# Altium PCB PCB SENSOR RPM.PcbDoc
Units mm, origin at the board's own origin, x right, y up, seen from the top; angles counter-clockwise.
Board outline 50 x 20 mm, 2 copper layers (Top Layer, Bottom Layer), stack 0.884 mm thick; 15 components, 7 nets, 41 pads, 6 vias.
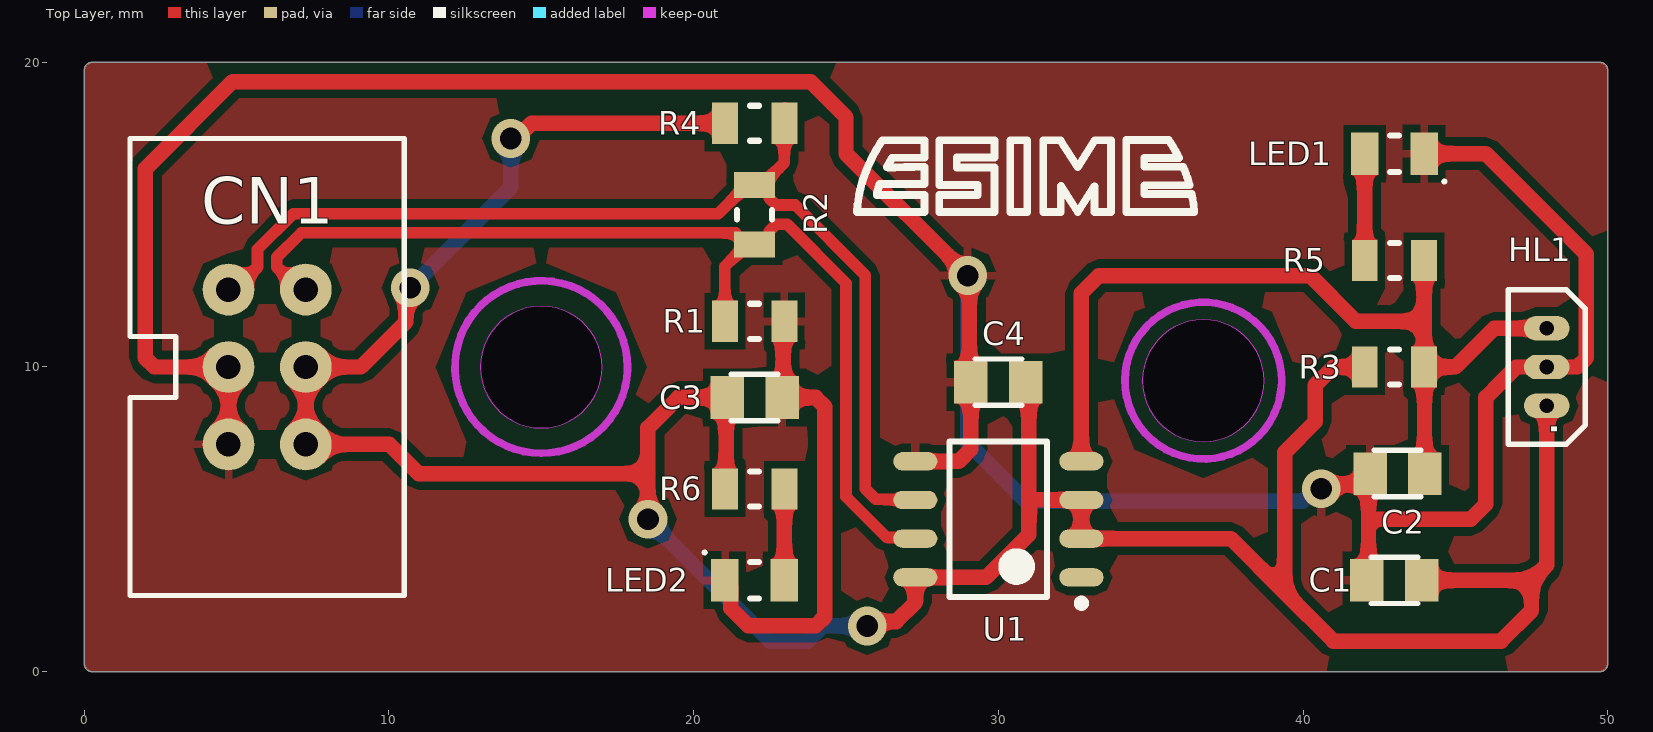
[diagram p0: Top Layer view]
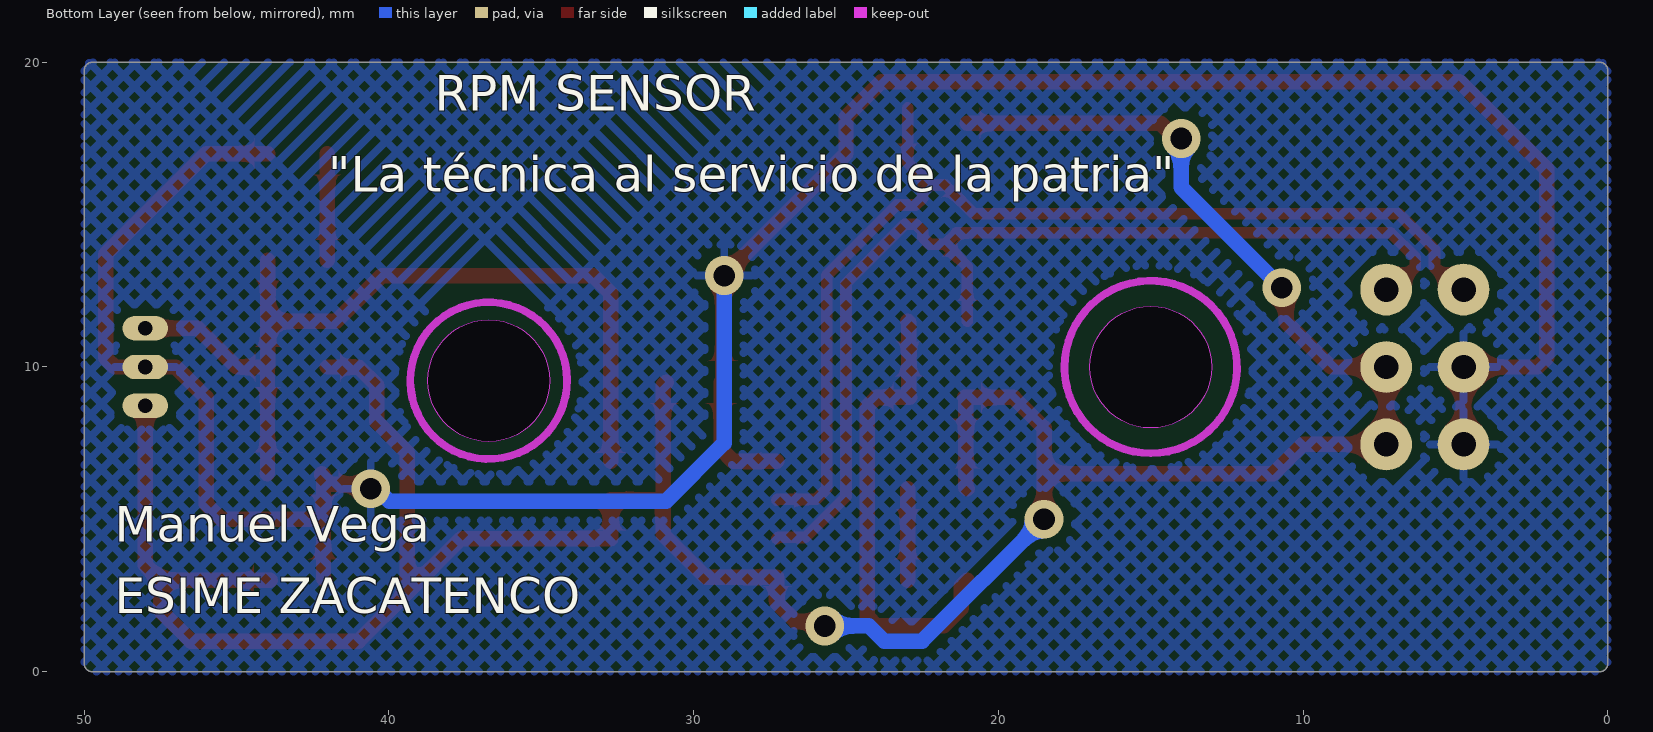
[diagram p1: Bottom Layer view, seen from below]

## Layer stack, top to bottom
Top Solder: solder mask 0.0102, Solder Resist, Dk 3.5
Top Layer: signal copper 0.0356
Dielectric 1: dielectric 0.8128, FR-4, Dk 4.8
Bottom Layer: signal copper 0.0356
Bottom Solder: solder mask 0.0102, Solder Resist, Dk 3.5

## Board outline
0,0.254 0,19.746 cw(c0.254,19.746) 0.254,20 49.746,20 cw(c49.746,19.746) 50,19.746 50,0.254 cw(c49.746,0.254) 49.746,0 0.254,0 cw(c0.254,0.254)
cut-out: 34.728,9.553 ccw(c36.728,9.553) 36.728,7.553 ccw(c36.728,9.553) 38.728,9.553 ccw(c36.728,9.553) 36.728,11.553 ccw(c36.728,9.553)
cut-out: 12.997,9.999 ccw(c14.997,9.999) 14.997,7.999 ccw(c14.997,9.999) 16.997,9.999 ccw(c14.997,9.999) 14.997,11.999 ccw(c14.997,9.999)

## Design rules (kind name [scope] priority, off if disabled: settings)
Clearance [All] p1: gap=0.254 ignorepadtopadclearanceinfootprint=FALSE
DiffPairsRouting DiffPairsRouting_1 [All] p1: maxlimit=0.254 minlimit=0.254 mostfreqgap=0.254 toplayer_minwidth=0.381 toplayer_maxwidth=0.381 toplayer_prefwidth=0.381 bottomlayer_minwidth=0.381 bottomlayer_maxwidth=0.381 bottomlayer_prefwidth=0.381 maxuncoupledlength=12.7
DiffPairsRouting [All] p2: maxlimit=0.254 minlimit=0.254 mostfreqgap=0.381 toplayer_minwidth=0.381 toplayer_maxwidth=0.762 toplayer_prefwidth=0.381 bottomlayer_minwidth=0.381 bottomlayer_maxwidth=0.762 bottomlayer_prefwidth=0.381 maxuncoupledlength=12.7
HoleSize [All] p1: absolutevalues=TRUE maxlimit=6.3 minlimit=0.2 maxpercent=80.000 minpercent=20.000
MinimumSolderMaskSliver [All] p1: minsoldermaskwidth=0.2
PolygonConnect [All] p1: connectstyle=Relief reliefconductorwidth=0.254 reliefentries=4 polygonreliefangle="90 Angle" airgapwidth=0.254
RoutingVias [All] p1: holewidth=0.711 width=1.27 viastyle="Through Hole" minholewidth=0.305 minwidth=0.4 maxholewidth=0.711 maxwidth=1.27
SolderMaskExpansion [All] p1: expansion=0.102 istentingtop=FALSE
Width [All] p1: maxlimit=1.27 minlimit=0.254 preferedwidth=0.254
27 further rules are at their usual default settings.

## Classes and differential pairs
differential pair D: +D_P -D_N

## Components (designator, comment, footprint, x,y, rotation, side; value= is the part's Value field where it differs from the comment)
C1 "0.01uF" C0805 43,3 r0 top
C2 "680pF" C0805 43.1,6.5 r0 top
C3 "0.1UF" C0805 22,9 r180 top
C4 "0.001UF" C0805 30,9.5 r0 top
CN1 "IDC_6V" IDC_MALE_6V 6,10 r270 top
HL1 "DRV5033" DRV5033 48,8.73 r90 top
LED1 "LED BLUE" LED0805 43,17 r0 top
LED2 "LED_RED" LED0805 22,3 r180 top
R1 "470" R0805 22,11.5 r0 top
R2 "120" R0805 22,15 r270 top
R3 "10K" R0805 43,10 r180 top
R4 "470" R0805 22,18 r0 top
R5 "100" R0805 43,13.5 r0 top
R6 "100" R0805 22,6 r180 top
U1 "MAX485" IC485 30,5 r180 top

## Footprints (in the part's own frame and the unit in brackets; to place one, negate y for a bottom-side part, rotate by r counter-clockwise, add the part's x,y. Pads: shape width x height; smd on the part's side, far side on the other; paste and mask are expansions set on the pad)
C0805 [mm] "Chip Capacitor, 2-Leads, Body 2.00x1.25mm, IPC Medium Density"
  rect 1.1x1.4 smd: 1(-0.9,0) 2(0.9,0)
  silkscreen extent -0.76,-0.76 0.76,0.76, body extent -1.05,-0.67 1.05,0.67, height 0.85
DRV5033 [mm]
  oval 0.8x1.5 hole 0.48: 1(0,0) 2(1.27,0) 3(2.54,0)
  silkscreen extent -1.27,-1.27 3.81,1.27, body extent -1.07,-10 3.61,0.25, height 2
IC485 [mm] "SOIC, 8-Leads, Body 4.90x3.90mm, Pitch 1.27mm, IPC Medium Density"
  oval 1.45x0.6 smd: 1(-2.725,1.905) 2(-2.725,0.635) 3(-2.725,-0.635) 4(-2.725,-1.905) 5(2.725,-1.905) 6(2.725,-0.635) 7(2.725,0.635) 8(2.725,1.905)
  silkscreen extent -2.85,-2.55 1.6,2.88, body extent -2,-2.55 2,2.55, height 1.75
IDC_MALE_6V [mm]
  round 1.7 hole 0.8: 1(-2.54,-1.27) 2(-2.54,1.27) 3(0,-1.27) 4(0,1.27) 5(2.54,-1.27) 6(2.54,1.27)
  silkscreen extent -7.5,-4.5 7.5,4.5, body extent -7.4,-4.6 7.6,4.4, height 9
LED0805 [mm] "Chip Diode, 2-Leads, Body 2.00x1.25mm, IPC Medium Density"
  rect 0.9x1.4 smd: 1(-0.975,0) 2(0.975,0)
  silkscreen extent -0.15,-0.96 1.69,0.6, body extent -1.05,-0.67 1.05,0.67, height 1
R0805 [mm] "Chip Resistor, 2-Leads, Body 2.05x1.30mm, IPC Medium Density"
  rect 0.85x1.35 smd: 1(-0.975,0) 2(0.975,0)
  silkscreen extent -0.15,-0.58 0.15,0.58, body extent -1.05,-0.67 1.05,0.67, height 0.35

## Part data
C1 C2 C3 C4: library part CAP0805
CN1: library part IDC_MALE_6V
LED1 LED2: library part LED0805, "LED 0805"
R1 R2 R3 R4 R5 R6: library part R0805
U1: library part IC485

## Via types
v1: diameter 1.27, hole 0.711, Top Layer to Bottom Layer, 6 vias

## Nets (pads, with @x,y where several pads share a name; then routed paths per layer and width w, separated by ;. In a path a pad name is that pad's centre, name@x,y a point inside that pad or via, vN(x,y) a via of type N, cw(c..) or ccw(c..) an arc to the next point about the centre after c; other vN are vias at no path point)
3.3V: C1.2 C3.2 C4.2 CN1.4 CN1.6 HL1.1 R3.2 R4.1 R6.2 U1.2 U1.3 U1.8 | length 102.2
  Top Layer w0.508: v1(10.7,12.6) 10.554,12.454 10.554,11.477 9.077,10 CN1.4 CN1.6 10.013,7.46 10.973,6.5 18.5,6.5 ; v1(14,17.5) 14.179,17.5 14.679,18 R4.1 ; v1(18.5,5) 18.5,6.5 ; R6.2 21.063,6.038 C3.2@21.063,9 ; C3.2 C3.2@21.063,9 ; v1(25.7,1.5) 25.846,1.646 26.646,1.646 27.275,2.275 U1.8 29.595,3.095 31,4.5 31,5.5 ; C4.2 31,9.4 31,5.5 ; R3.2 41,10 40.4,9.4 40.4,8.2 39.4,7.2 39.4,2.6 ; C1.2 47.5,3 ; HL1.1 48,3.5 47.5,3 ; 18.5,6.5 18.5,8 19.5,9 C3.2@21.063,9 ; 31,5.5 31.135,5.635 U1.3 U1.2 37.635,4.365 39.4,2.6 ; 39.4,2.6 41,1 46.5,1 47.5,2 47.5,3
  Bottom Layer w0.508: v1(10.7,12.6) 14,15.9 v1(14,17.5) ; v1(18.5,5) 22.5,1 23.747,1 24.247,1.5 v1(25.7,1.5)
D_N: CN1.2 R1.1 R2.2 U1.7 | length 34.6
  Top Layer w0.381: CN1.2 7.06,12.54 6.318,13.282 6.318,13.598 7.12,14.4 21.375,14.4 R2.2@21.75,14.025 ; R1.1 21.025,13.3 R2.2@21.75,14.025 ; U1.7 27.233,4.407 26.33,4.407 25,5.737 25,12.754 23.071,14.682 22.708,14.682 22.484,14.459 22.484,14.259 22.25,14.025 R2.2 R2.2@21.75,14.025
D_P: CN1.1 R2.1 R4.2 U1.6 | length 35.6
  Top Layer w0.381: CN1.1 4.94,12.54 5.683,13.282 5.683,13.861 6.857,15.035 20.81,15.035 21.75,15.975 R2.1@22.25,15.975 ; R4.2@22.975,18.5 22.975,16.7 R2.1@22.25,15.975 ; U1.6 27.254,5.657 25.979,5.657 25.635,6 25.635,13.017 23.334,15.317 22.708,15.317 22.484,15.541 22.484,15.74 R2.1@22.25,15.975
GND: C1.1 C2.1 C3.1 C4.1 CN1.3 CN1.5 HL1.2 LED1.2 LED2.2 R1.2 U1.5 | length 111.3
  Top Layer w0.508: CN1.5 CN1.3 2.298,10 2,10.298 2,16.5 4.865,19.365 23.837,19.365 25,18.202 25,17 v1(29,13) 29.05,12.95 29.05,9.55 C4.1 29.1,7.303 28.702,6.905 U1.5 ; LED2.2 21.221,2.804 21.221,2.077 21.798,1.5 24,1.5 24.302,1.802 24.302,8.698 24,9 C3.1 22.938,9.038 22.938,11.462 R1.2 ; v1(40.6,6) 40.746,6.146 41.904,6.146 42.2,6.442 C2.1 42.15,6.45 42.15,5 42.15,4.75 ; C1.1 42.15,3.05 42.15,4.75 ; LED1.2 46,17 49.3,13.7 49.3,10.3 49,10 HL1.2 47,10 46.5,9.5 46,9 46,5.5 45.5,5 42.4,5 42.15,4.75
  Bottom Layer w0.508: v1(29,13) 29,7.5 30.9,5.6 39.994,5.6 40.394,6 v1(40.6,6)
NetLED1_1: LED1.1 R5.1 | length 3.5
  Top Layer w0.508: R5.1 LED1.1
NetLED2_1: LED2.1 R6.1 | length 3
  Top Layer w0.508: LED2.1 R6.1
SEN: C2.2 HL1.3 R3.1 R5.2 U1.4 | length 29.2
  Top Layer w0.508: U1.4 32.725,12.425 33.3,13 40.238,13 41.738,11.5 43.975,11.5 ; R5.2 43.975,11.5 ; C2.2 43.987,6.513 43.987,9.988 R3.1 ; HL1.3 46.27,11.27 45,10 R3.1 ; R3.1 43.975,11.5
pads on no net: U1.1

## Polygon pours and split planes (outlines as drawn)
GND on Top Layer "GND_L01_P000" (solid, pour order 0): 0,0.254 0,19.746 cw(c0.254,19.746) 0.254,20 49.746,20 cw(c49.746,19.746) 50,19.746 50,0.254 cw(c49.746,0.254) 49.746,0 0.254,0 cw(c0.254,0.254)
GND on Bottom Layer "GND_L02_P002" (hatched 45Degree grid 0.508 track 0.254, pour order 2): 0,0.254 0,19.746 cw(c0.254,19.746) 0.254,20 49.746,20 cw(c49.746,19.746) 50,19.746 50,0.254 cw(c49.746,0.254) 49.746,0 0.254,0 cw(c0.254,0.254)

## Keep-outs
Keep-Out Layer:
  lines w0.254: 17.826,9.899 cw(c14.997,9.999) 17.828,9.999 ; 39.3,9.502 cw(c36.728,9.553) 39.301,9.553

## Silkscreen, mask and mechanical layers (free items; w line width, h text height)
Top Overlay:
  drawing of 1946 lines, arcs and shapes, not listed
Bottom Overlay:
  text "RPM SENSOR" at 38.5,18.022 h2
  text "\"La técnica al servicio de la patria\"" at 42,15.356 h2
  text "Manuel Vega" at 49,3.876 h2
  text "ESIME ZACATENCO" at 49,1.522 h2
PCB EDGES:
  circle w0.013: c36.728,9.553 r2
  circle w0.013: c14.997,9.999 r2
  lines w0.254: 0,0.254 ccw(c0.254,0.254) 0.254,0 ; 0,0.254 ccw(c0.254,0.254) 0.254,0 ; 0,0.254 0,19.746 ; 0,0.254 0,19.746 ; 0,19.746 cw(c0.254,19.746) 0.254,20 ; 0,19.746 cw(c0.254,19.746) 0.254,20 ; 0.254,0 49.746,0 ; 0.254,0 49.746,0 ; 0.254,20 49.746,20 ; 0.254,20 49.746,20 ; 49.746,0 ccw(c49.746,0.254) 50,0.254 ; 49.746,0 ccw(c49.746,0.254) 50,0.254 ; 49.746,20 cw(c49.746,19.746) 50,19.746 ; 49.746,20 cw(c49.746,19.746) 50,19.746 ; 50,0.254 50,19.746 ; 50,0.254 50,19.746

## Dimensions
49.746,20 to 49.746,0 on DIMENSION
0,19.746 to 50,19.746 on DIMENSION